# EAGLE board main (EAGLE 7.3.0)
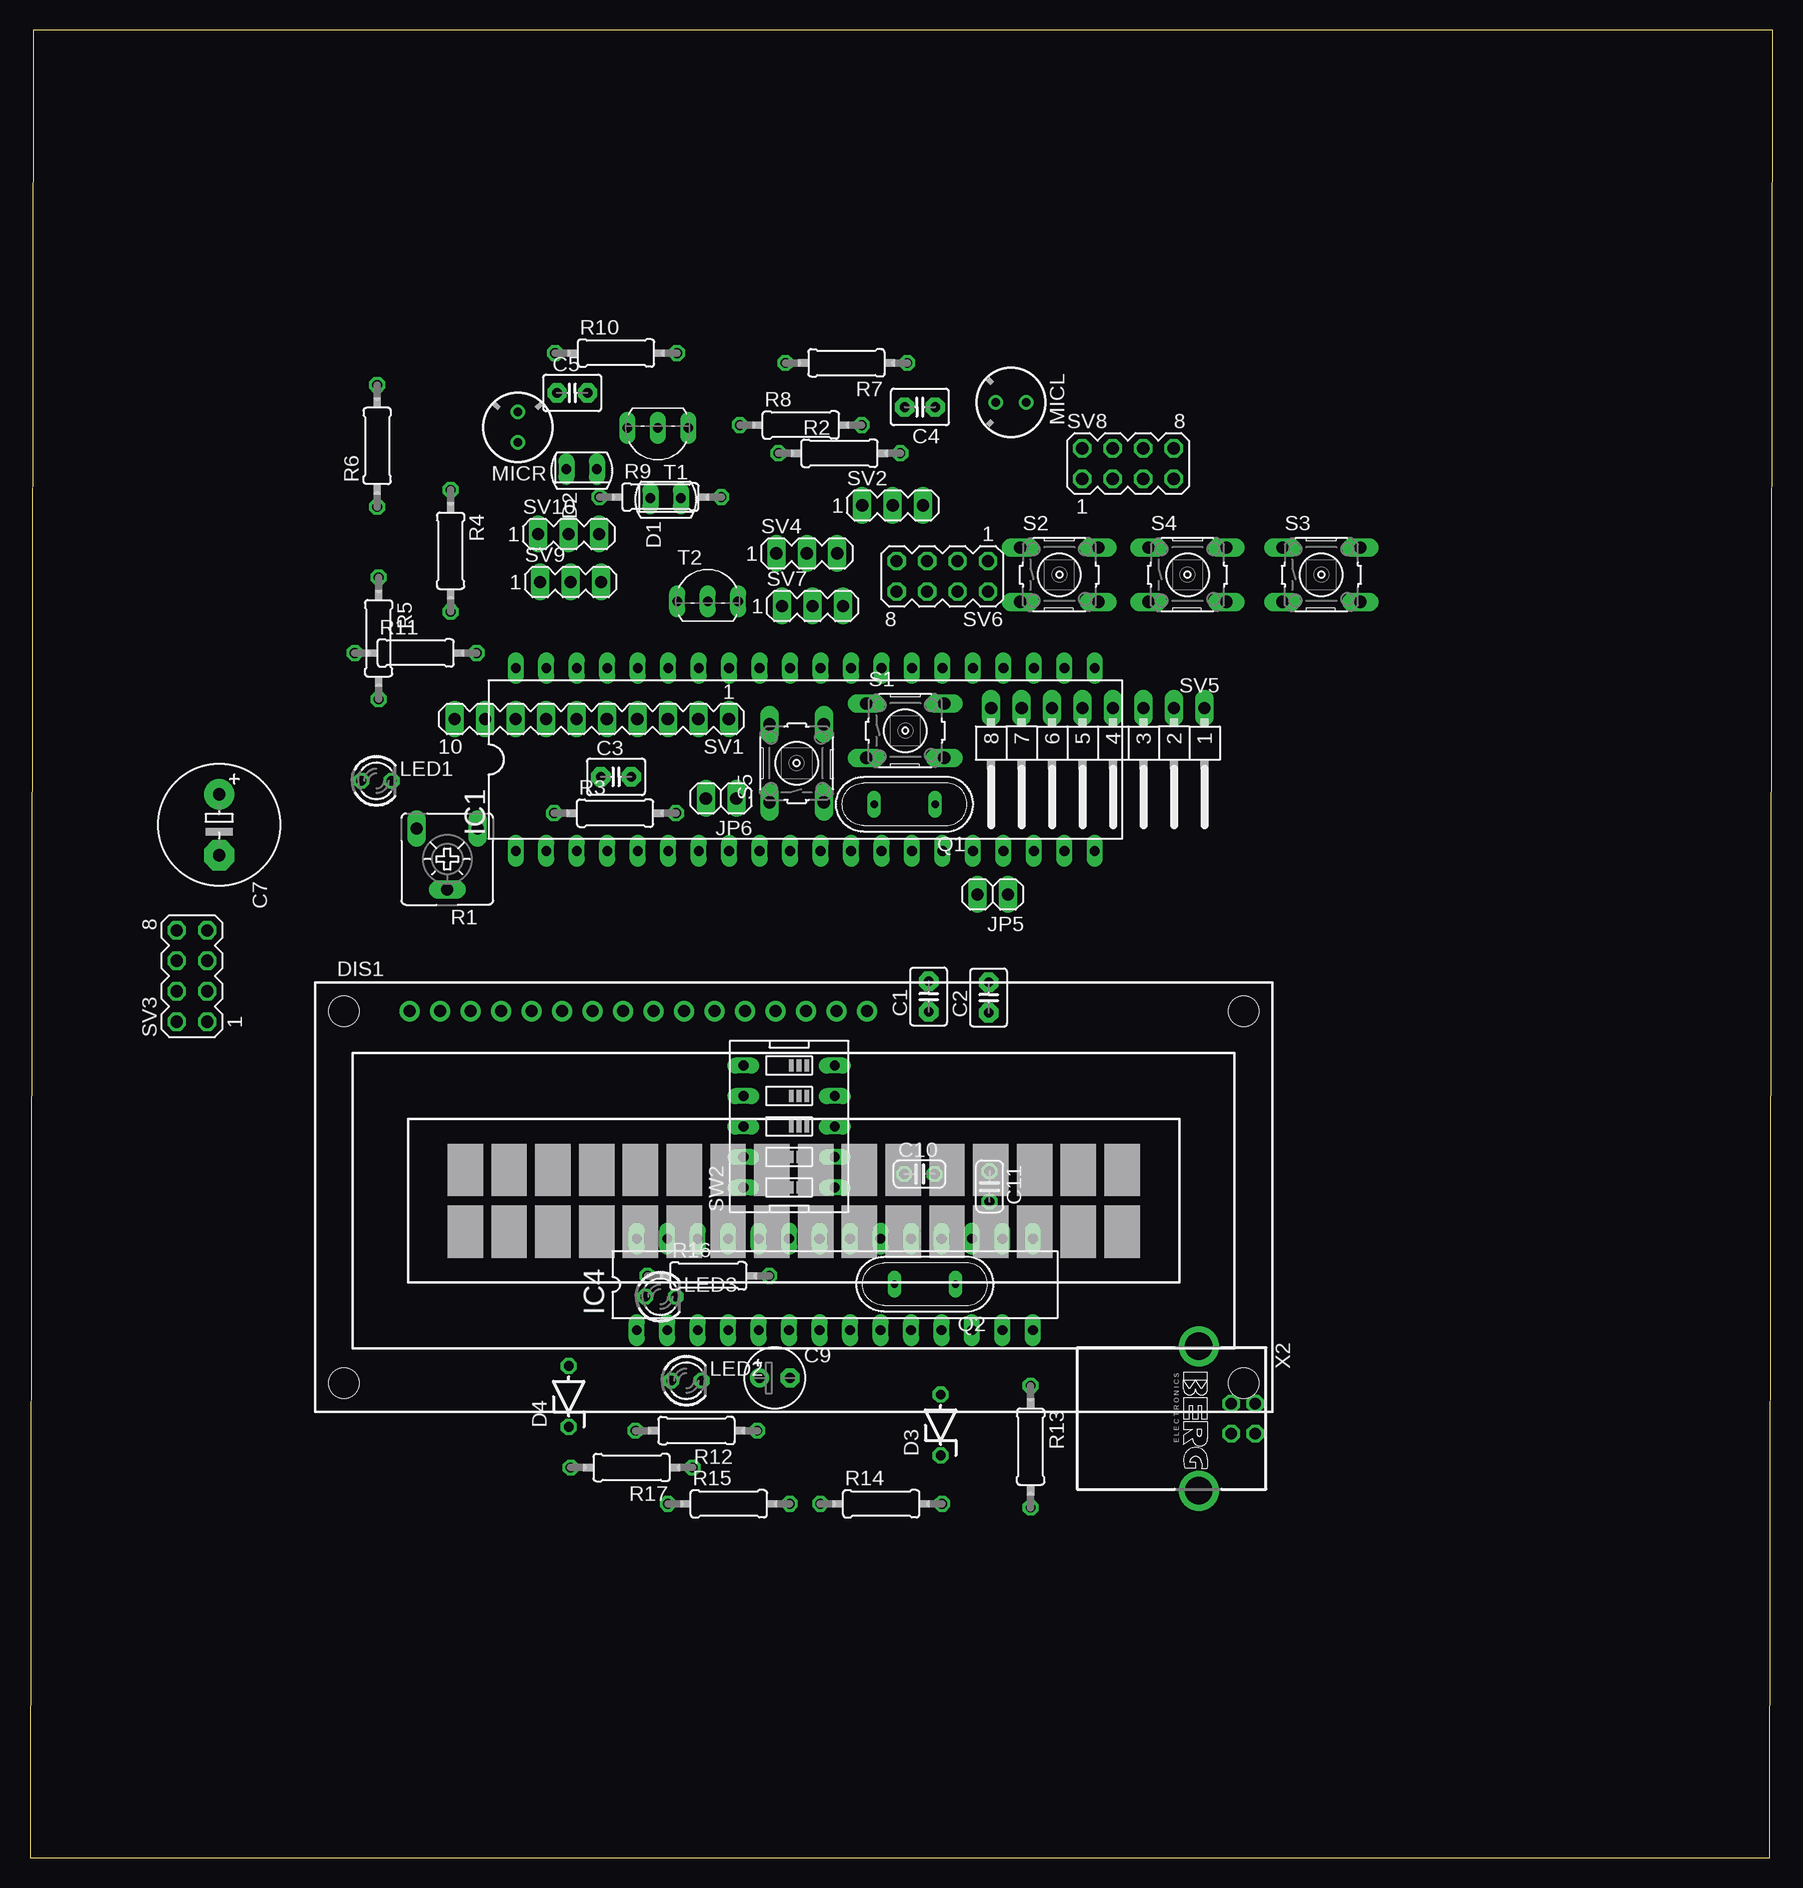
[diagram p0: board, top side]
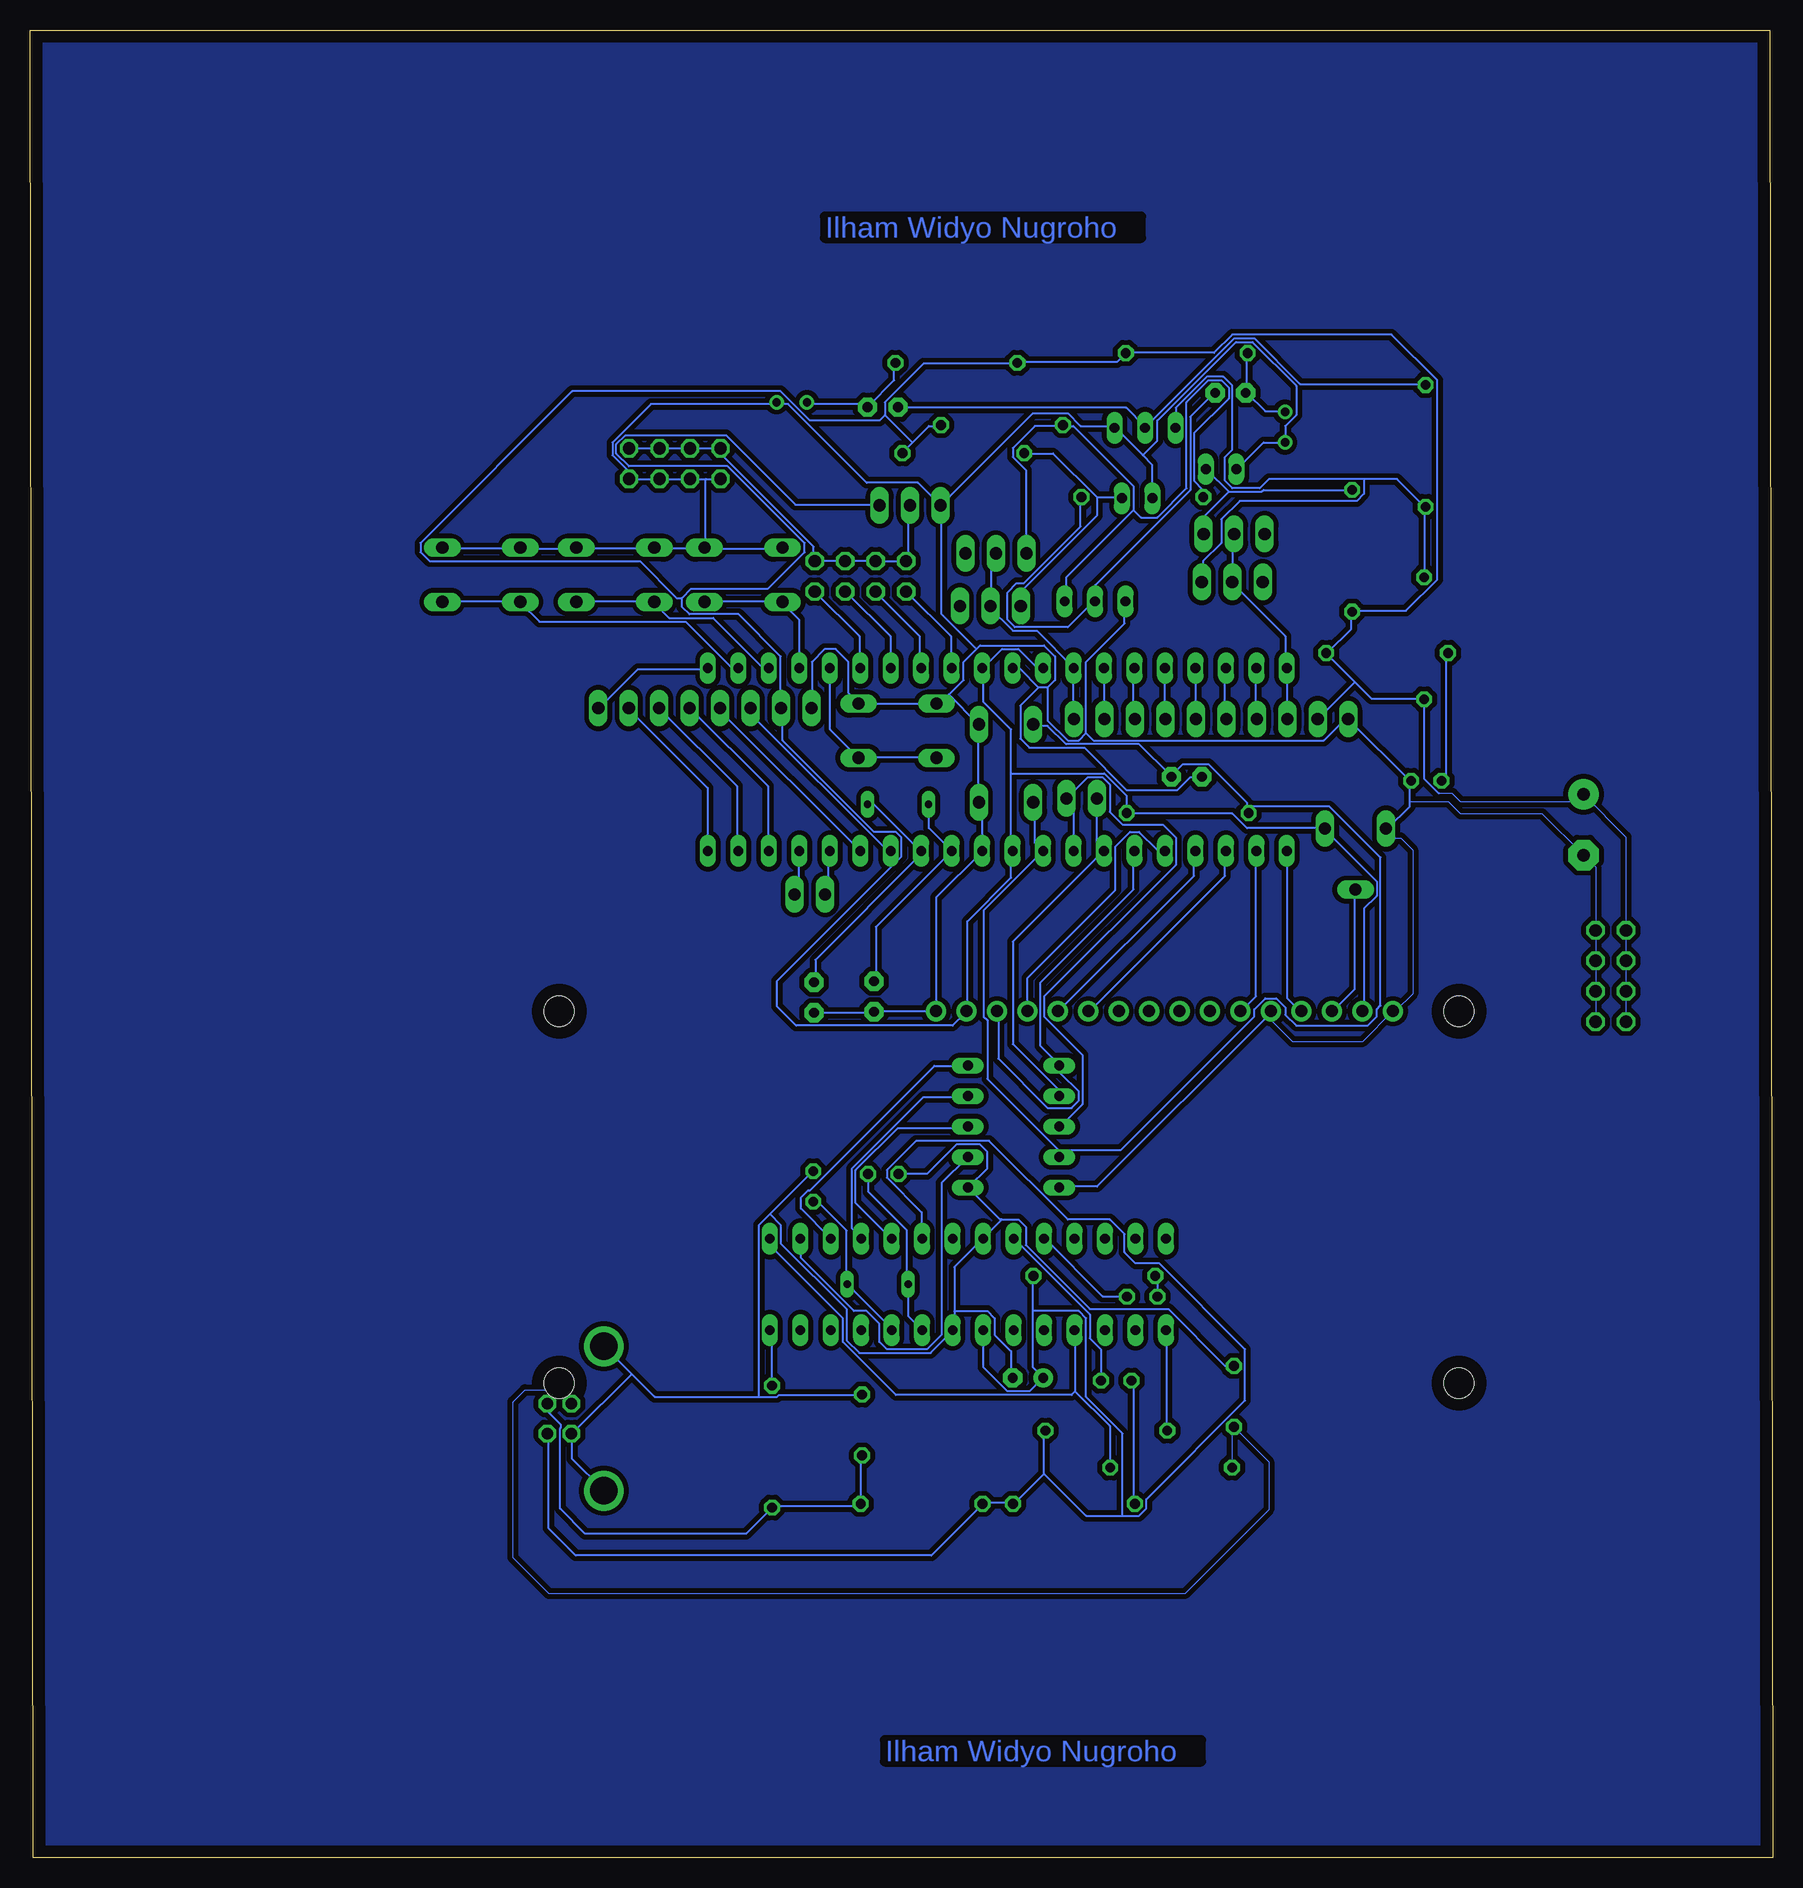
[diagram p1: board, bottom side, seen from below]

Size 145.27 x 152.34 mm. Coordinates in mm from the lower left corner, seen from the top.
Outline: 0,0 145,0 145.27,152.34 0.27,152.34 0,0
Copper layers (1*16): Top 0.035mm / dielectric 1.5mm / Bottom 0.035mm
Design rules "default": minimum track width 6mil, minimum drill 0.35mm, track to track 6mil, track to pad 6mil, pad to pad 6mil, via to via 6mil, smd to smd 6mil, copper to edge 40mil, drill to drill 6mil, minimum pad ring 10mil, minimum via ring 8mil, stop-mask expansion 4mil, vias tented up to drill 0mil, thermal gap 10mil

## Footprints (pad centres in the part's own frame; a part is rotated, then mirrored left to right if it is on the bottom)
C2.5-3 = drill 0.813 pad 1.6 octagon: 1 -1.27,0; 2 1.27,0
E5-10,5 = drill 1.016 pad 2.54: + -2.54,0 | drill 1.016 pad 2.54 octagon: - 2.54,0
E2,5-5 = drill 0.813 pad 1.6: + -1.27,0 | drill 0.813 pad 1.6 octagon: - 1.27,0
C025-024X044 = drill 0.813 octagon: 1 -1.27,0; 2 1.27,0
SFH225 = drill 0.813 long: A 0,1.27; K 0,-1.27
ZDIO-5 = drill 0.813 octagon: A 2.54,0; C -2.54,0
TUXGR_16X2_R2 = drill 1 pad 1.676: 1 -32,15.5; 2 -29.46,15.5; 3 -26.92,15.5; 4 -24.38,15.5; 5 -21.84,15.5; 6 -19.3,15.5; 7 -16.76,15.5; 8 -14.22,15.5; 9 -11.68,15.5; 10 -9.14,15.5; 11 -6.6,15.5; 12 -4.06,15.5; 13 -1.52,15.5; 14 1.02,15.5; 15 3.56,15.5; 16 6.1,15.5 | hole 2.5: -37.5,-15.5; 37.5,-15.5; -37.5,15.5; 37.5,15.5
DIL40 = drill 0.813 long: 1 -24.13,-7.62; 2 -21.59,-7.62; 3 -19.05,-7.62; 4 -16.51,-7.62; 5 -13.97,-7.62; 6 -11.43,-7.62; 7 -8.89,-7.62; 8 -6.35,-7.62; 9 -3.81,-7.62; 10 -1.27,-7.62; 11 1.27,-7.62; 12 3.81,-7.62; 13 6.35,-7.62; 14 8.89,-7.62; 15 11.43,-7.62; 16 13.97,-7.62; 17 16.51,-7.62; 18 19.05,-7.62; 19 21.59,-7.62; 20 24.13,-7.62; 21 24.13,7.62; 22 21.59,7.62; 23 19.05,7.62; 24 16.51,7.62; 25 13.97,7.62; 26 11.43,7.62; 27 8.89,7.62; 28 6.35,7.62; 29 3.81,7.62; 30 1.27,7.62; 31 -1.27,7.62; 32 -3.81,7.62; 33 -6.35,7.62; 34 -8.89,7.62; 35 -11.43,7.62; 36 -13.97,7.62; 37 -16.51,7.62; 38 -19.05,7.62; 39 -21.59,7.62; 40 -24.13,7.62
DIL28-3 = drill 0.813 long: 1 -16.51,-3.81; 2 -13.97,-3.81; 3 -11.43,-3.81; 4 -8.89,-3.81; 5 -6.35,-3.81; 6 -3.81,-3.81; 7 -1.27,-3.81; 8 1.27,-3.81; 9 3.81,-3.81; 10 6.35,-3.81; 11 8.89,-3.81; 12 11.43,-3.81; 13 13.97,-3.81; 14 16.51,-3.81; 15 16.51,3.81; 16 13.97,3.81; 17 11.43,3.81; 18 8.89,3.81; 19 6.35,3.81; 20 3.81,3.81; 21 1.27,3.81; 22 -1.27,3.81; 23 -3.81,3.81; 24 -6.35,3.81; 25 -8.89,3.81; 26 -11.43,3.81; 27 -13.97,3.81; 28 -16.51,3.81
1X02 = drill 1.016 long: 1 -1.27,0; 2 1.27,0
LED3MM = drill 0.813 octagon: A -1.27,0; K 1.27,0
F6050AP = drill 0.7 pad 1.2: 1 0,1.27; 2 0,-1.27
QS = drill 0.61 long: 1 -2.54,0; 2 2.54,0
CA6V = drill 1.016 long: A -2.54,-2.54; E 2.54,-2.54; S 0,2.54
0207/10 = drill 0.813 octagon: 1 -5.08,0; 2 5.08,0
B3F-10XX = drill 1.016 long: 1 -3.251,2.261; 2 3.251,2.261; 3 -3.251,-2.261; 4 3.251,-2.261
MA10-1 = drill 1.016 long: 1 -11.43,0; 2 -8.89,0; 3 -6.35,0; 4 -3.81,0; 5 -1.27,0; 6 1.27,0; 7 3.81,0; 8 6.35,0; 9 8.89,0; 10 11.43,0
MA03-1 = drill 1.016 long: 1 -2.54,0; 2 0,0; 3 2.54,0
MA04-2 = drill 1.016 octagon: 1 -3.81,-1.27; 2 -3.81,1.27; 3 -1.27,-1.27; 4 -1.27,1.27; 5 1.27,-1.27; 6 1.27,1.27; 7 3.81,-1.27; 8 3.81,1.27
MA08-1W = drill 1.016 long: 1 -8.89,0; 2 -6.35,0; 3 -3.81,0; 4 -1.27,0; 5 1.27,0; 6 3.81,0; 7 6.35,0; 8 8.89,0
EDG-05 = drill 0.813 long: 1 -5.08,-3.81; 2 -2.54,-3.81; 3 0,-3.81; 4 2.54,-3.81; 5 5.08,-3.81; 6 5.08,3.81; 7 2.54,3.81; 8 0,3.81; 9 -2.54,3.81; 10 -5.08,3.81
TO92-EBC = drill 0.813 long: B 0,-1.27; C 2.54,-1.27; E -2.54,-1.27
PN61729-S = drill 0.95 octagon: 1 1.25,4.71; 2 -1.25,4.71; 3 -1.25,2.71; 4 1.25,2.71 | drill 2.3 pad 2.9: S1 -6.02,0; S2 6.02,0

## Placement (x,y rotation side)
C1  22p  [C2.5-3]  74.91,71.77 90 top
C2  22p  [C2.5-3]  79.91,71.69 90 top
C3  10nF  [C2.5-3]  48.85,90.09 0 top
C4  100nF  [C2.5-3]  74.18,120.91 180 top
C5  100nF  [C2.5-3]  45.2,122.09 0 top
C7  1000uF/16V  [E5-10,5]  15.77,86.09 270 top
C9  10uF/16V  [E2,5-5]  62.09,39.98 0 top
C10  22pF  [C025-024X044]  74.14,56.98 0 top
C11  22pF  [C025-024X044]  79.98,55.94 270 top
D1  SFH225  [SFH225]  52.98,113.31 270 top
D2  SFH225  [SFH225]  45.98,115.74 270 top
D3  DZ3,6V  [ZDIO-5]  75.91,36.06 90 top
D4  DZ3,6V  [ZDIO-5]  44.91,38.44 90 top
DIS1  TUXGR_16X2_R2  [TUXGR_16X2_R2]  63.66,55.05 0 top
IC1  MEGA16-P  [DIL40]  64.63,91.53 0 top
IC4  MEGA8-P  [DIL28-3]  67.09,47.77 0 top
JP5  [1X02]  80.26,80.29 180 top
JP6  [1X02]  57.61,88.29 180 top
LED1  merah  [LED3MM]  28.88,89.76 0 top
LED2  Merah  [LED3MM]  54.72,39.76 0 top
LED3  hijau  [LED3MM]  52.56,46.76 0 top
MICL  MC  [F6050AP]  81.77,121.31 270 top
MICR  MC  [F6050AP]  40.66,119.23 180 top
Q1  8MHz  [QS]  72.91,87.8 180 top
Q2  12MHz  [QS]  74.61,47.8 180 top
R1  20K  [CA6V]  34.78,83.23 180 top
R2  56K  [0207/10]  67.47,117.06 0 top
R3  10K  [0207/10]  48.77,87.06 0 top
R4  56K  [0207/10]  35.06,108.93 270 top
R5  10K  [0207/10]  29.06,101.63 270 top
R6  100K  [0207/10]  28.94,117.67 90 top
R7  10K  [0207/10]  68.05,124.59 180 top
R8  10K  [0207/10]  64.25,119.41 0 top
R9  100K  [0207/10]  52.55,113.41 0 top
R10  10K  [0207/10]  48.85,125.41 0 top
R11  330  [0207/10]  32.15,100.41 0 top
R12  10K  [0207/10]  55.55,35.59 180 top
R13  68  [0207/10]  83.41,34.25 270 top
R14  2K2  [0207/10]  70.95,29.49 0 top
R15  330  [0207/10]  58.25,29.49 0 top
R16  330  [0207/10]  56.55,48.49 0 top
R17  68  [0207/10]  50.15,32.51 180 top
S1  [B3F-10XX]  72.96,93.93 0 top
S2  [B3F-10XX]  85.8,106.93 0 top
S3  [B3F-10XX]  107.64,106.93 0 top
S4  [B3F-10XX]  96.48,106.93 0 top
S5  [B3F-10XX]  63.91,91.22 90 top
SV1  [MA10-1]  46.82,94.91 180 top
SV2  [MA03-1]  71.91,112.71 0 top
SV3  [MA04-2]  13.5,73.48 90 top
SV4  [MA03-1]  64.75,108.71 0 top
SV5  [MA08-1W]  89.01,95.82 180 top
SV6  [MA04-2]  76.05,106.8 180 top
SV7  [MA03-1]  65.22,104.33 0 top
SV8  [MA04-2]  91.52,116.2 0 top
SV9  [MA03-1]  45.06,106.33 0 top
SV10  [MA03-1]  44.9,110.33 0 top
SW2  [EDG-05]  63.28,60.94 90 top
T1  [TO92-EBC]  52.33,117.91 180 top
T2  [TO92-EBC]  56.49,105.98 0 top
X2  PN61729-S  [PN61729-S]  97.43,36.6 270 top

## Library data of the parts
C1-C5 = capacitor-wima
C7 C9-C11 R2-R11 = rcl
D1 D2 = opto-trans-siemens; OC_FARNELL: unknown; OC_NEWARK: unknown
D3 D4 = diode
DIS1 = display-lcd; OC_FARNELL: unknown; OC_NEWARK: unknown
IC1 = atmel; MPN: ATMEGA16-16PU; OC_FARNELL: 9171142; OC_NEWARK: 01M6885
IC4 = atmel
JP5 JP6 = pinhead
LED1-LED3 = led
MICL MICR = microphon
Q1 Q2 SW2 = special
R1 = pot
R12-R17 = resistor
S1-S5 = switch-omron; MPN: B3F-1000; OC_FARNELL: 176432; OC_NEWARK: 36M3542
SV1-SV10 = con-lstb; OC_FARNELL: unknown; OC_NEWARK: unknown
T1 T2 = transistor
X2 = con-berg

## Nets
DGND: C9.- C10.1 C11.1 D3.A D4.A IC4.8 IC4.22 SW2.1 X2.4 X2.S1 X2.S2
GND: C1.1 C2.1 C3.1 C7.- D1.K D2.K DIS1.1 DIS1.5 DIS1.16 IC1.11 IC1.31 LED1.K MICL.1 MICR.1 R1.E S1.1 S1.2 S2.1 S2.2 S3.1 S3.2 S4.1 S4.2 S5.3 S5.4 SV1.10 SV2.1 SV3.1 SV3.3 SV3.5 SV3.7 SV5.8 SV8.1 SV8.3 SV8.5 SV8.7 SW2.10 T1.E T2.E
MISO: IC1.7 JP6.2 SW2.7
MOSI: DIS1.14 IC1.6 SW2.6
N$1: IC1.33 SV1.1 SV4.2 SV7.2
N$2: IC1.34 SV1.2
N$3: IC1.35 SV1.3
N$4: IC1.36 SV1.4
N$5: IC1.37 SV1.5
N$6: IC1.38 SV1.6
N$7: IC1.39 SV1.7
N$8: D2.A R4.1 SV10.3
N$9: IC1.24 S2.3 S2.4
N$10: DIS1.13 IC1.5
N$11: DIS1.12 IC1.4
N$12: DIS1.11 IC1.3
N$13: DIS1.6 IC1.2
N$14: R5.1 R6.1 SV9.3 T1.C
N$15: DIS1.3 R1.S
N$16: C1.2 IC1.12 Q1.2
N$17: C2.2 IC1.13 Q1.1
N$18: DIS1.4 IC1.1
N$19: D1.A R2.1 SV7.1
N$20: IC1.23 S4.3 S4.4
N$21: IC1.40 SV1.8 SV9.2 SV10.2
N$22: C4.2 R6.2 T1.B
N$23: C4.1 MICL.2 R7.1
N$24: R8.1 R9.1 SV4.1 T2.C
N$25: C5.2 R9.2 T2.B
N$26: C5.1 MICR.2 R10.1
N$27: IC1.22 S3.3 S3.4
N$28: IC1.25 S1.3 S1.4
N$30: IC1.21 SV5.1
N$32: IC1.20 SV5.2
N$33: IC1.19 SV5.3
N$34: IC1.18 SV5.4
N$35: IC1.15 SV5.5
N$36: IC1.14 SV5.6
N$37: IC1.16 JP5.2
N$38: IC1.17 JP5.1
N$41: LED1.A R11.1
N$42: IC4.1 R12.2
N$44: IC1.26 SV6.2
N$45: IC1.27 SV6.4
N$46: IC1.28 SV6.6
N$47: IC1.29 SV6.8
N$51: C10.2 IC4.9 Q2.2
N$52: C11.2 IC4.10 Q2.1
N$53: IC4.14 R13.1
N$55: LED2.A R15.1
N$56: LED3.A R16.1
N$57: IC4.23 LED2.K
N$58: IC4.24 LED3.K
N$59: D4.C R17.2 X2.3
N$67: IC4.4 IC4.15 R17.1
N$69: D3.C R13.2 R14.2 X2.2
N$175: IC4.17 SW2.5
N$176: IC4.18 SW2.4
N$177: IC4.19 SW2.3
N$178: IC4.16 SW2.2
RESET: C3.2 IC1.9 R3.1 S5.1 S5.2 SW2.9
SCK: IC1.8 JP6.1 SW2.8
VCC: C7.+ DIS1.2 DIS1.15 IC1.10 IC1.30 IC1.32 R1.A R2.2 R3.2 R4.2 R5.2 R7.2 R8.2 R10.2 R11.2 SV1.9 SV2.3 SV3.2 SV3.4 SV3.6 SV3.8 SV5.7
VDD: SV2.2 SV6.1 SV6.3 SV6.5 SV6.7 SV8.2 SV8.4 SV8.6 SV8.8
VPP: C9.+ IC4.7 IC4.20 R12.1 R14.1 R15.2 R16.2 X2.1

## Tracks (layer width: path | path; a pad name or v marks a point on that pad's centre or on a via)
DGND
  Bottom 0.152: 64.25,53.19 62.88,53.19 62.27,52.58 62.27,51.05 56.93,45.72 50.38,45.72 45.66,41 45.05,41 D4.A | 64.25,53.19 65.77,51.66 IC4.22 65.92,51.51 68.21,49.23 68.21,45.57 | 68.21,45.57 68.21,44.04 IC4.8 68.36,43.89 70.19,42.06 76.14,42.06 77.2,43.13 77.2,45.72 82.69,51.21 82.69,52.73 83.6,53.65 | 64.25,53.19 64.4,53.19 66.99,55.78 SW2.1 66.99,55.93 65.47,57.45 65.47,58.83 66.08,59.44 68.06,59.44 70.5,57 72.78,57 C10.1 | 68.21,45.57 65.47,45.57 64.86,44.96 64.86,43.59 63.49,42.22 63.49,40.08 C9.- | X2.S2 97.47,30.63 100.06,33.22 100.06,35.2 X2.4 100.06,35.36 95.19,40.23 95.03,40.23 | 84.52,38.41 93.2,38.41 95.03,40.23 | 84.52,38.41 82.99,38.41 82.84,38.56 75.98,38.56 D3.A | 95.03,40.23 97.32,42.52 X2.S1 | 83.6,53.65 84.52,52.73 84.52,38.41 | 83.6,53.65 80.1,57.15 C11.1
GND
  Bottom 0.1: 30.26,88 27,88 26,87 19.22,87 C7.- 14.77,82.55 SV3.7 SV3.5 SV3.3 SV3.1 | R1.E 31.47,85 31,85 30,84 30,72 31.45,70.55 DIS1.1 34.21,68 40,68 42.13,70.13
  Bottom 0.152: R1.E 32.09,85.8 30.26,87.63 30.26,88 30.26,89.61 LED1.K 30.26,89.76 35.29,94.79 SV1.10 35.44,94.79 35.75,94.79 37.43,93.12 56.63,93.12 57.24,93.73 | SW2.10 59.37,55.93 56.32,55.93 42.13,70.13 41.84,70.41 DIS1.5 | S3.2 110.88,109.12 104.48,109.12 S3.1 104.33,109.12 99.76,109.12 S4.2 99.61,109.12 93.36,109.12 S4.1 93.2,109.12 89.09,109.12 S2.2 | 88.94,114.91 90.16,114.91 SV8.3 90.31,114.91 92.75,114.91 SV8.5 92.9,114.91 95.19,114.91 SV8.7 95.34,115.06 95.34,115.52 96.71,116.89 96.71,117.96 93.51,121.16 83.15,121.16 MICL.1 82.99,121.16 82.08,121.16 75.53,114.61 71.26,114.61 69.43,112.78 SV2.1 | 88.94,114.91 87.72,114.91 SV8.1 | S2.1 82.69,109.12 88.94,109.12 S2.2 | 88.94,114.91 88.94,109.27 S2.2 | D2.K 44.59,115.82 42.45,117.96 40.78,117.96 MICR.1 40.63,118.11 40.63,119.33 39.71,120.24 39.71,122.68 43.37,126.34 44.74,126.34 51.29,119.79 51.29,118.11 52.51,116.89 | 52.51,116.89 54.8,119.18 T1.E 54.95,119.33 57.69,119.33 58.76,120.4 61.66,120.4 69.28,112.78 SV2.1 | 52.51,116.89 51.75,116.13 51.75,113.39 D1.K | C2.1 79.79,70.41 74.92,70.41 C1.1 74.76,70.56 69.89,70.56 DIS1.16 69.73,70.56 69.73,80.01 65.92,83.82 IC1.11 65.92,83.97 65.92,87.78 66.08,87.94 S5.3 66.23,88.09 66.23,94.34 S5.4 66.23,94.49 68.67,96.93 | 61.2,97.54 62.72,99.06 63.33,99.06 IC1.31 | 60.44,97.54 61.2,97.54 | 60.44,97.54 59.83,98.15 59.83,100.13 60.74,101.04 66.08,101.04 66.38,100.74 | 66.38,100.74 67.45,99.67 67.45,98.15 68.67,96.93 | 68.67,96.93 69.28,96.32 69.58,96.32 S1.1 | 57.24,93.73 57.24,99.67 54.04,102.87 54.04,104.7 T2.E | 57.24,93.73 57.85,93.12 58.76,93.12 60.44,94.79 60.44,97.54
  Bottom 0.152: 68.67,96.93 S1.1 | S1.1 69.73,96.16 76.14,96.16 S1.2 76.29,96.32 77.05,97.08 77.05,99.67 78.12,100.74 79.03,100.74 80.1,99.67 80.1,95.86 SV5.8 | 61.2,97.54 62.72,96.01 62.72,93.27 61.96,92.51 57.39,92.51 53.89,89 49.62,89 48.55,90.07 47.64,90.07 C3.1 | 66.38,100.74 69.28,103.63 69.28,112.62 SV2.1
MISO
  Bottom 0.152: SW2.7 59.52,63.55 59.52,64.01 63.33,67.82 63.33,76.35 55.87,83.82 IC1.7 55.87,83.97 56.32,84.43 56.32,88.24 JP6.2
MOSI
  Bottom 0.152: DIS1.14 64.55,70.41 64.55,66.6 60.44,62.48 58.46,62.48 57.85,63.09 57.85,63.86 59.37,65.38 59.37,65.99 SW2.6 59.52,66.14 61.05,67.67 61.05,72.93 53.28,80.7 53.28,83.82 IC1.6
N$1
  Bottom 0.152: SV1.1 58.3,94.94 58.3,99.06 IC1.33 58.3,99.21 61.35,102.26 63.33,102.26 65.31,104.24 SV7.2 65.16,104.39 65.16,108.36 64.86,108.66 SV4.2
N$2
  Bottom 0.152: IC1.34 55.71,99.06 55.71,94.94 SV1.2
N$3
  Bottom 0.152: IC1.35 53.28,99.06 53.28,94.94 SV1.3
N$4
  Bottom 0.152: IC1.36 50.68,99.06 50.68,94.94 SV1.4
N$5
  Bottom 0.152: IC1.37 48.09,99.06 48.09,94.94 SV1.5
N$6
  Bottom 0.152: IC1.38 45.66,99.06 45.66,94.94 SV1.6
N$7
  Bottom 0.152: IC1.39 43.06,99.06 43.06,94.94 SV1.7
N$8
  Bottom 0.152: 45.35,113.84 42.61,113.84 42.45,114 35.14,114 R4.1 | 45.35,113.84 47.18,115.67 D2.A | 45.35,113.84 47.33,111.86 47.33,110.34 SV10.3
N$9
  Bottom 0.152: IC1.24 81.16,99.21 81.16,103.17 82.54,104.55 S2.3 82.69,104.7 88.94,104.7 S2.4
N$10
  Bottom 0.152: IC1.5 50.68,83.97 51.29,83.97 52.82,85.5 53.58,85.5 54.8,84.28 54.8,80.64 62.11,73.32 62.11,70.56 DIS1.13
N$11
  Bottom 0.152: IC1.4 48.25,83.82 48.25,81.84 59.52,70.56 DIS1.12
N$12
  Bottom 0.152: IC1.3 45.66,83.82 45.66,81.84 56.93,70.56 DIS1.11
N$13
  Bottom 0.152: IC1.2 43.06,83.82 43.06,71.78 44.28,70.56 DIS1.6
N$14
  Bottom 0.152: R5.1 29.04,106.83 29.04,112.47 R6.1 29.04,112.62 31.33,114.91 34.07,114.91 | 34.07,114.91 42,114.91 42.76,114.15 45.05,114.15 45.66,114.76 45.66,116.74 45.05,117.35 45.05,122.68 45.81,123.44 47.18,123.44 49.77,120.85 49.77,119.33 T1.C | 34.07,114.91 34.07,113.69 34.68,113.08 44.44,113.08 45.96,111.56 45.96,109.58 47.48,108.05 47.48,106.38 SV9.3
N$15
  Bottom 0.152: R1.S 34.84,80.62 34.84,72.39 36.66,70.56 DIS1.3
N$16
  Bottom 0.152: Q1.2 70.34,87.78 70.34,85.8 68.52,83.97 IC1.12 68.52,83.82 74.76,77.57 74.76,73.15 C1.2
N$17
  Bottom 0.152: Q1.1 75.37,87.78 74.92,87.78 71.11,83.97 IC1.13 71.11,83.82 71.11,83.52 79.79,74.83 79.79,73 C2.2
N$18
  Bottom 0.152: IC1.1 40.47,83.82 40.47,71.63 39.41,70.56 DIS1.4
N$19
  Bottom 0.152: 56.32,113.39 54.34,113.39 D1.A | 56.32,113.39 59.98,117.04 62.27,117.04 R2.1 | 56.32,113.39 56.32,111.86 62.57,105.61 62.57,104.39 SV7.1
N$20
  Bottom 0.152: IC1.23 83.75,99.21 84.21,99.21 88.33,103.33 91.98,103.33 93.2,104.55 S4.3 93.36,104.7 99.61,104.7 S4.4
N$21
  Bottom 0.152: SV1.8 40.47,94.94 40.47,99.06 IC1.40 40.63,99.21 40.63,101.8 45.05,106.22 SV9.2 45.05,106.38 45.05,110.19 SV10.2
N$22
  Bottom 0.152: R6.2 29.04,122.83 39.41,122.83 43.22,126.64 44.89,126.64 52.21,119.33 T1.B 52.36,119.33 53.89,120.85 72.78,120.85 C4.2
N$23
  Bottom 0.152: MICL.2 80.4,121.16 75.68,121.16 75.53,121.01 C4.1 75.37,121.01 73.24,123.14 73.24,124.51 R7.1
N$24
  Bottom 0.152: 53.28,112.32 58.91,106.68 58.91,104.85 T2.C | 53.28,112.32 53.28,114.3 58.3,119.33 59.07,119.33 R8.1 59.22,119.33 61.5,119.33 63.33,117.5 63.33,116.74 62.27,115.67 62.27,108.81 SV4.1 | 53.28,112.32 52.67,111.71 51.29,111.71 48.86,114.15 48.86,121.31 47.03,123.14 45.96,123.14 45.35,122.53 45.35,121.61 48.25,118.72 48.25,114.76 47.48,114 47.48,113.54 R9.1
N$25
  Bottom 0.152: C5.2 46.57,122.07 48.55,120.09 48.55,114 56.48,106.07 56.48,104.85 T2.B 56.63,104.7 58.76,102.56 63.18,102.56 63.79,103.17 63.79,105.46 63.03,106.22 62.42,106.22 57.69,110.95 57.69,113.39 R9.2
N$26
  Bottom 0.152: MICR.2 40.78,120.55 42.3,120.55 43.83,122.07 C5.1 43.83,122.22 43.83,125.27 R10.1
N$27
  Bottom 0.152: IC1.22 86.35,99.21 86.8,99.21 90.61,103.02 102.81,103.02 104.33,104.55 S3.3 104.48,104.7 110.88,104.7 S3.4
N$28
  Bottom 0.152: IC1.25 78.57,99.06 78.57,94.03 76.29,91.75 S1.4 76.14,91.75 69.73,91.75 S1.3
N$30
  Bottom 0.152: IC1.21 88.78,99.06 94.58,99.06 97.78,95.86 SV5.1
N$32
  Bottom 0.152: IC1.20 88.78,83.97 88.78,89.15 95.34,95.71 SV5.2
N$33
  Bottom 0.152: IC1.19 86.35,83.97 86.35,89.31 92.75,95.71 SV5.3
N$34
  Bottom 0.152: IC1.18 83.75,83.97 83.75,89.31 90.16,95.71 SV5.4
N$35
  Bottom 0.152: IC1.15 76.14,83.97 87.87,95.71 SV5.5
N$36
  Bottom 0.152: IC1.14 73.54,83.97 73.85,83.97 85.13,95.25 85.13,95.71 SV5.6
N$37
  Bottom 0.152: IC1.16 78.73,83.82 78.73,80.47 78.88,80.31 JP5.2
N$38
  Bottom 0.152: IC1.17 81.16,83.82 81.16,80.62 81.47,80.31 JP5.1
N$41
  Bottom 0.152: R11.1 27.22,100.28 27.22,90.07 27.52,89.76 LED1.A
N$42
  Bottom 0.152: R12.2 50.53,35.66 50.53,43.89 IC4.1
N$44
  Bottom 0.152: IC1.26 76.14,99.21 76.14,101.8 79.79,105.46 SV6.2
N$45
  Bottom 0.152: IC1.27 73.54,99.21 73.54,101.8 77.2,105.46 SV6.4
N$46
  Bottom 0.152: IC1.28 71.11,99.21 71.11,101.8 74.76,105.46 SV6.6
N$47
  Bottom 0.152: IC1.29 68.52,99.21 68.52,101.8 72.17,105.46 SV6.8
N$51
  Bottom 0.152: IC4.9 70.95,44.04 72.02,45.11 72.02,47.7 Q2.2 72.17,47.85 72.17,52.27 75.37,55.47 75.37,56.84 C10.2
N$52
  Bottom 0.152: IC4.10 73.39,44.04 77.05,47.7 Q2.1 77.2,47.85 77.2,52.27 79.49,54.56 79.94,54.56 C11.2
N$53
  Bottom 0.152: R13.1 83.45,39.47 83.45,43.89 IC4.14
N$55
  Bottom 0.152: R15.1 53.28,29.57 53.28,39.47 53.43,39.62 LED2.A
N$56
  Bottom 0.152: LED3.A 51.29,46.79 51.29,48.31 51.45,48.46 R16.1
N$57
  Bottom 0.152: LED2.K 56.02,39.78 56.02,42.37 56.93,43.28 56.93,45.26 63.18,51.51 IC4.23
N$58
  Bottom 0.152: LED3.K 53.89,46.79 55.87,46.79 60.59,51.51 IC4.24
N$59
  Bottom 0.1: R17.2 45.07,35.74 D4.C 42,32.99 42,29 49,22 102,22 105,25 105,38 104,39 101,39 100.14,38.14 X2.3
N$67
  Bottom 0.152: 58.15,38.86 55.26,35.97 55.26,32.61 R17.1 | 58.15,38.86 58.15,43.89 IC4.4 | 58.15,38.86 58.46,38.56 73.09,38.56 77.51,42.98 77.51,44.96 83.45,50.9 83.45,51.51 IC4.15
N$69
  Bottom 0.152: D3.C 75.98,33.38 75.98,29.57 R14.2 76.14,29.41 76.29,29.26 83.3,29.26 R13.2 85.58,27 99,27 101.1,29.1 101.1,35.75 101,35.84 101,36.08 102.46,37.53 X2.2
N$175
  Bottom 0.152: SW2.5 67.14,65.99 69.89,65.99 80.25,55.63 80.4,55.63 81.01,55.02 81.01,54.1 78.57,51.66 IC4.17
N$176
  Bottom 0.152: SW2.4 67.14,63.4 70.8,63.4 76.75,57.45 76.75,52.43 75.98,51.66 IC4.18
N$177
  Bottom 0.152: SW2.3 67.14,60.81 72.94,60.81 76.44,57.3 76.44,54.56 73.54,51.66 IC4.19
N$178
  Bottom 0.152: IC4.16 81.01,51.51 81.01,49.99 76.59,45.57 75.53,45.57 74.46,44.5 74.46,42.98 73.85,42.37 70.5,42.37 69.28,43.59 69.28,56.24 67.14,58.37 SW2.2
RESET
  Bottom 0.152: 43.83,87.63 43.83,87.94 47.03,91.14 49.16,91.14 50.08,90.22 C3.2 50.23,90.22 52.82,92.81 58.91,92.81 60.44,94.34 61.5,94.34 S5.2 | 43.83,87.63 43.83,87.17 R3.1 43.83,87.63 | 59.52,58.98 59.52,58.52 SW2.9 59.52,58.98 | 59.52,58.98 65.47,64.92 65.47,69.8 65.77,70.1 65.77,78.94 60.89,83.82 IC1.9 60.89,83.97 61.5,84.58 61.5,87.94 S5.1 | 43.83,87.63 36.97,87.63 32.7,83.36 32.7,71.02 33.01,70.71 33.01,70.1 33.77,69.34 39.71,69.34 40.63,70.26 40.63,70.87 41.39,71.63 42.3,71.63 43.22,70.71 43.22,70.1 54.34,58.98 59.52,58.98
S$1
  pour Bottom (isolate 0.406): 0,152 0,0 145,0 145,152
SCK
  Bottom 0.152: SW2.8 59.37,60.96 57.54,62.79 57.54,66.9 60.74,70.1 60.74,71.78 49.77,82.75 49.77,85.04 50.84,86.11 54.19,86.11 55.26,87.17 55.26,89.46 55.87,90.07 57.08,90.07 58.76,88.39 JP6.1 58.76,88.24 58.3,87.78 58.3,83.97 IC1.8
VCC
  Bottom 0.1: 15.79,88.7 16.48,88 26,88 26.7,88.7 27.82,88.7 | C7.+ 12.23,85.09 SV3.8 SV3.6 SV3.4 SV3.2
  Bottom 0.152: DIS1.2 34.07,70.56 34.07,79.1 33.01,80.16 33.01,81.38 37.27,85.65 R1.A 37.43,85.8 43.83,85.8 45.05,87.02 53.73,87.02 R3.2 53.89,87.17 53.89,88.54 55.71,90.37 63.49,90.37 | IC1.32 60.89,99.21 61.35,99.21 62.88,100.74 64.25,100.74 65.77,99.21 IC1.30 65.77,99.06 65.77,96.32 63.49,94.03 63.49,90.37 | 90.92,105 90.16,105.77 83.75,105.77 80.71,108.81 80.71,109.58 87.11,115.98 95.34,115.98 96.4,117.04 96.4,117.81 95.64,118.57 87.26,118.57 81.47,112.78 74.46,112.78 SV2.3 | 90.92,105 90.92,104.24 90.31,103.63 86.19,103.63 82.69,100.13 82.69,95.86 SV5.7 82.54,95.71 82.54,93.12 74.92,85.5 73.09,85.5 72.63,85.04 72.63,83.45 83.01,73.07 83.01,70.95 81.4,69.34 68.36,69.34 67.3,70.41 DIS1.15 67.14,70.56 67.14,78.03 63.49,81.69 63.49,83.82 IC1.10 63.49,83.97 63.49,90.37 | 71.72,117.96 72.48,117.2 R2.2 | 71.72,117.96 70.34,119.33 69.43,119.33 R8.2 | 74,120.24 71.72,117.96 | 74,120.24 74,121.31 70.8,124.51 63.03,124.51 R7.2 62.88,124.66 54.65,124.66 54.04,125.27 R10.2 53.89,125.42 46.57,125.42 45.05,126.95 31.79,126.95 27.98,123.14 27.98,106.53 30.57,103.94 34.99,103.94 R4.2 35.14,103.78 35.14,102.41 37.12,100.43 R11.2 37.12,100.28 34.84,97.99 | 34.84,97.99 33.46,96.62 29.2,96.62 R5.2 29.04,96.47 29.04,89.92 27.82,88.7 | 34.84,97.99 37.88,94.94 SV1.9 | 15.79,88.7 C7.+ | 90.92,105 91.38,105 94.42,108.05 111.95,108.05 112.71,108.81 112.71,109.58 100.06,122.22 82.69,122.22 80.25,119.79 74.46,119.79 74,120.24
VDD
  Bottom 0.152: SV8.8 95.19,117.5 92.9,117.5 SV8.6 92.75,117.5 90.31,117.5 SV8.4 90.16,117.5 87.72,117.5 SV8.2 87.56,117.35 87.56,116.89 79.94,109.27 79.94,108.2 SV6.1 79.79,108.05 77.35,108.05 SV6.3 77.2,108.05 74.92,108.05 SV6.5 74.76,108.05 72.33,108.05 SV6.7 72.17,108.2 72.02,108.36 72.02,112.62 SV2.2
VPP
  Bottom 0.152: IC4.7 65.77,43.89 65.77,40.84 63.79,38.86 61.96,38.86 60.89,39.93 C9.+ 60.89,40.08 61.66,40.84 61.66,45.57 | 61.66,45.57 61.66,48.46 R16.2 | 60.74,32 60.74,35.51 R12.1 | 60.74,32 63.18,29.57 R15.2 63.33,29.57 65.77,29.57 R14.1 65.92,29.41 70.14,25.19 99.78,25.19 102.04,27.46 102.04,35.2 X2.1 | 54.19,28.5 57.24,28.5 60.74,32 | 54.19,28.5 52.82,28.5 52.21,29.11 52.21,29.87 43.98,38.1 43.98,42.37 51.14,49.53 53.12,49.53 54.04,50.44 54.04,51.97 55.26,53.19 58.76,53.19 65.31,59.74 71.41,59.74 73.85,57.3 73.85,56.69 70.95,53.8 70.95,51.66 IC4.20 | 61.66,45.57 57.85,45.57 57.24,44.96 57.24,38.41 54.19,35.36 54.19,28.5

## Text on the board
Bottom: Ilham Widyo Nugroho | Ilham Widyo Nugroho